# Altium PCB lab1_lyahovskij_USB_I2C.PcbDoc
Units mm, origin at the board's own origin, x right, y up, seen from the top; angles counter-clockwise.
Board outline 49.2 x 21.45 mm, 4 copper layers (Top Layer, Signal Layer 1, Signal Layer 2, Bottom Layer), stack 1.522 mm thick; 22 components, 18 nets, 88 pads, 79 vias.
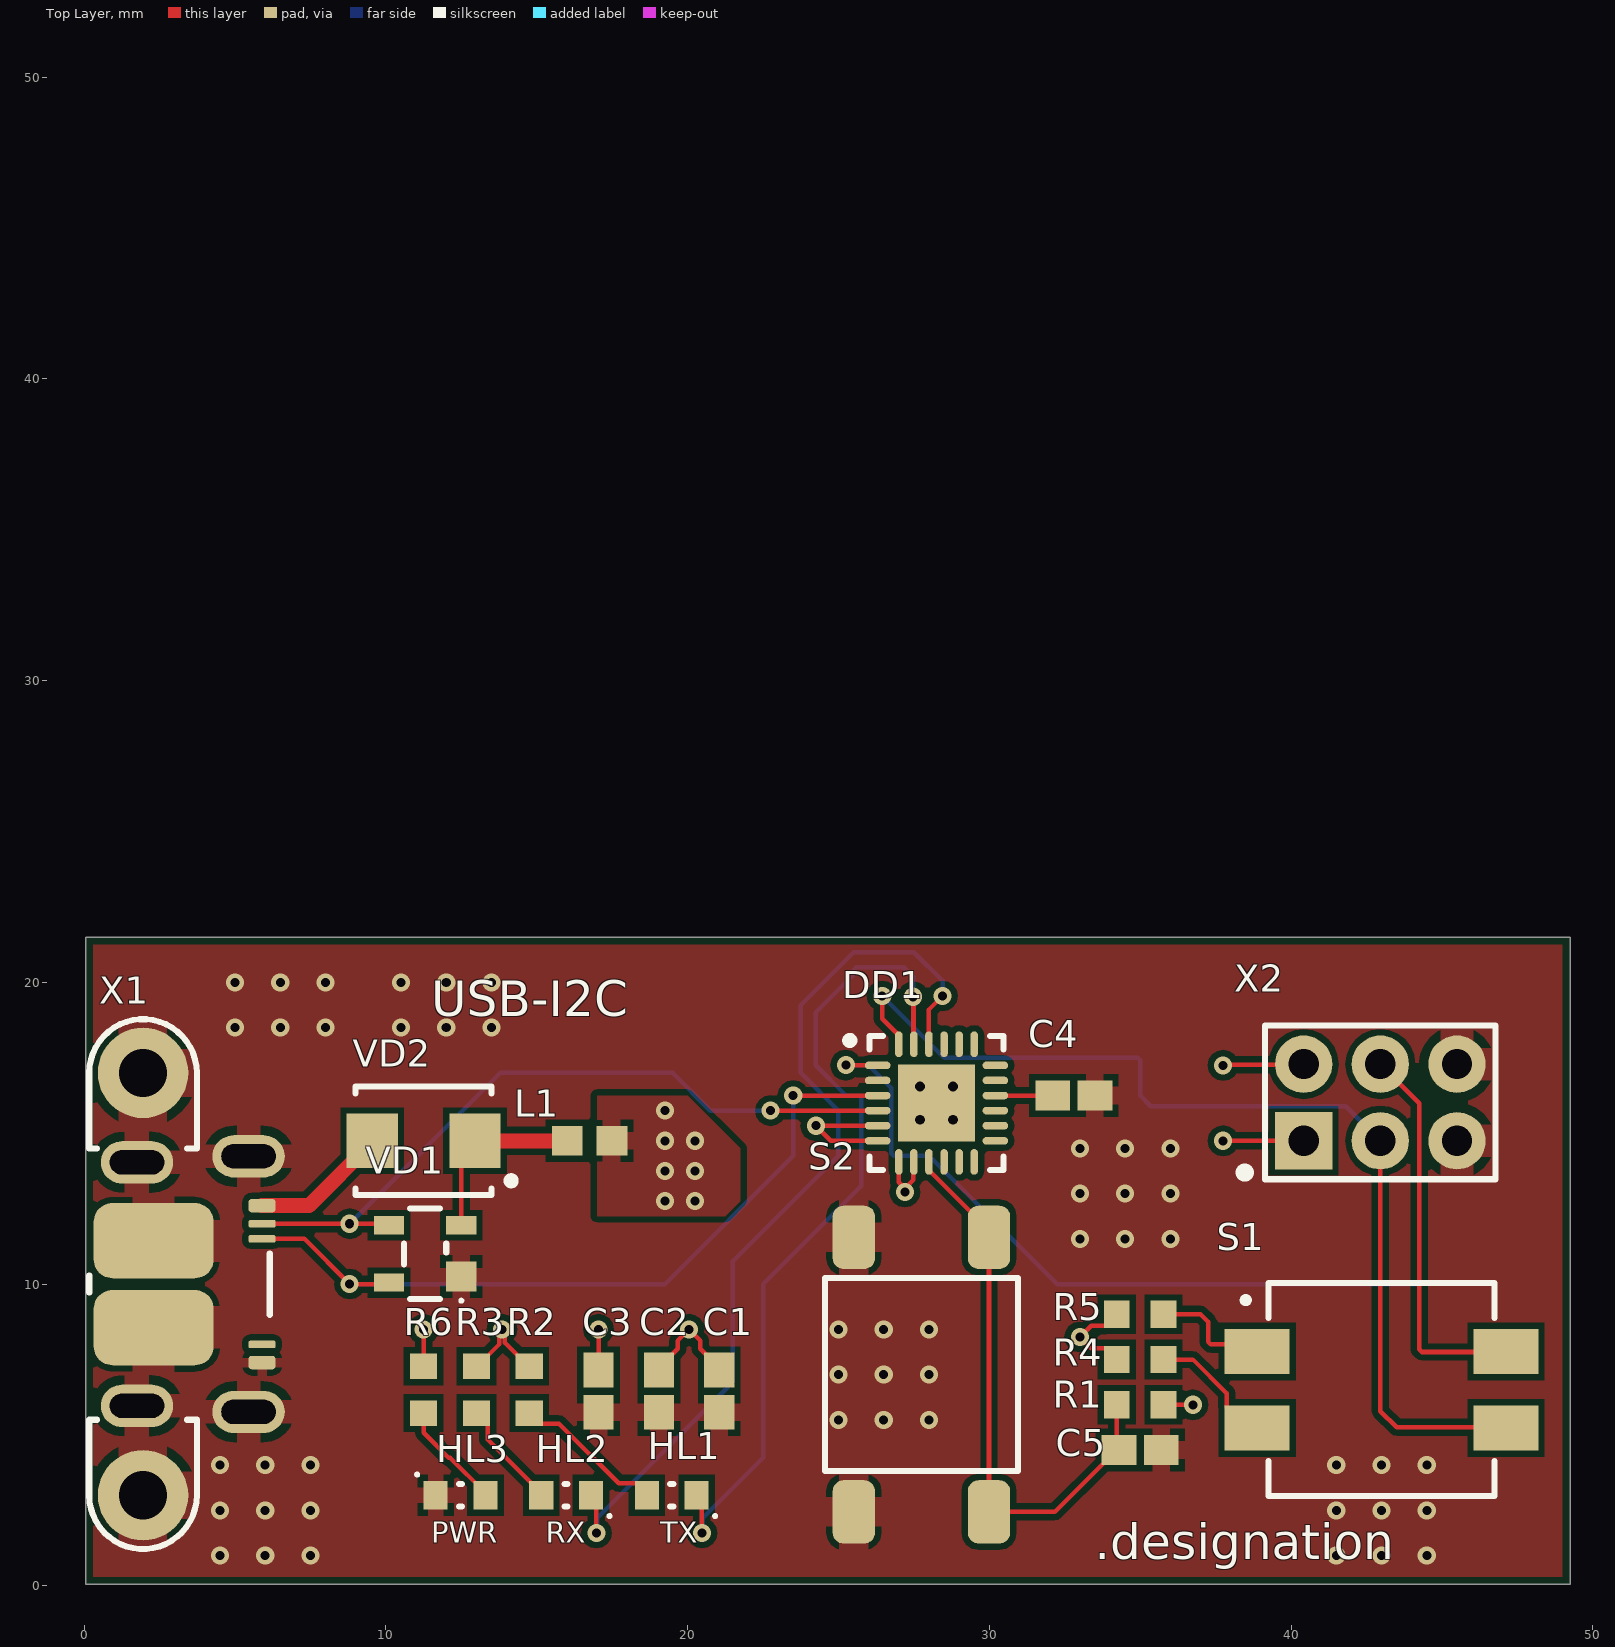
[diagram p0: Top Layer view]
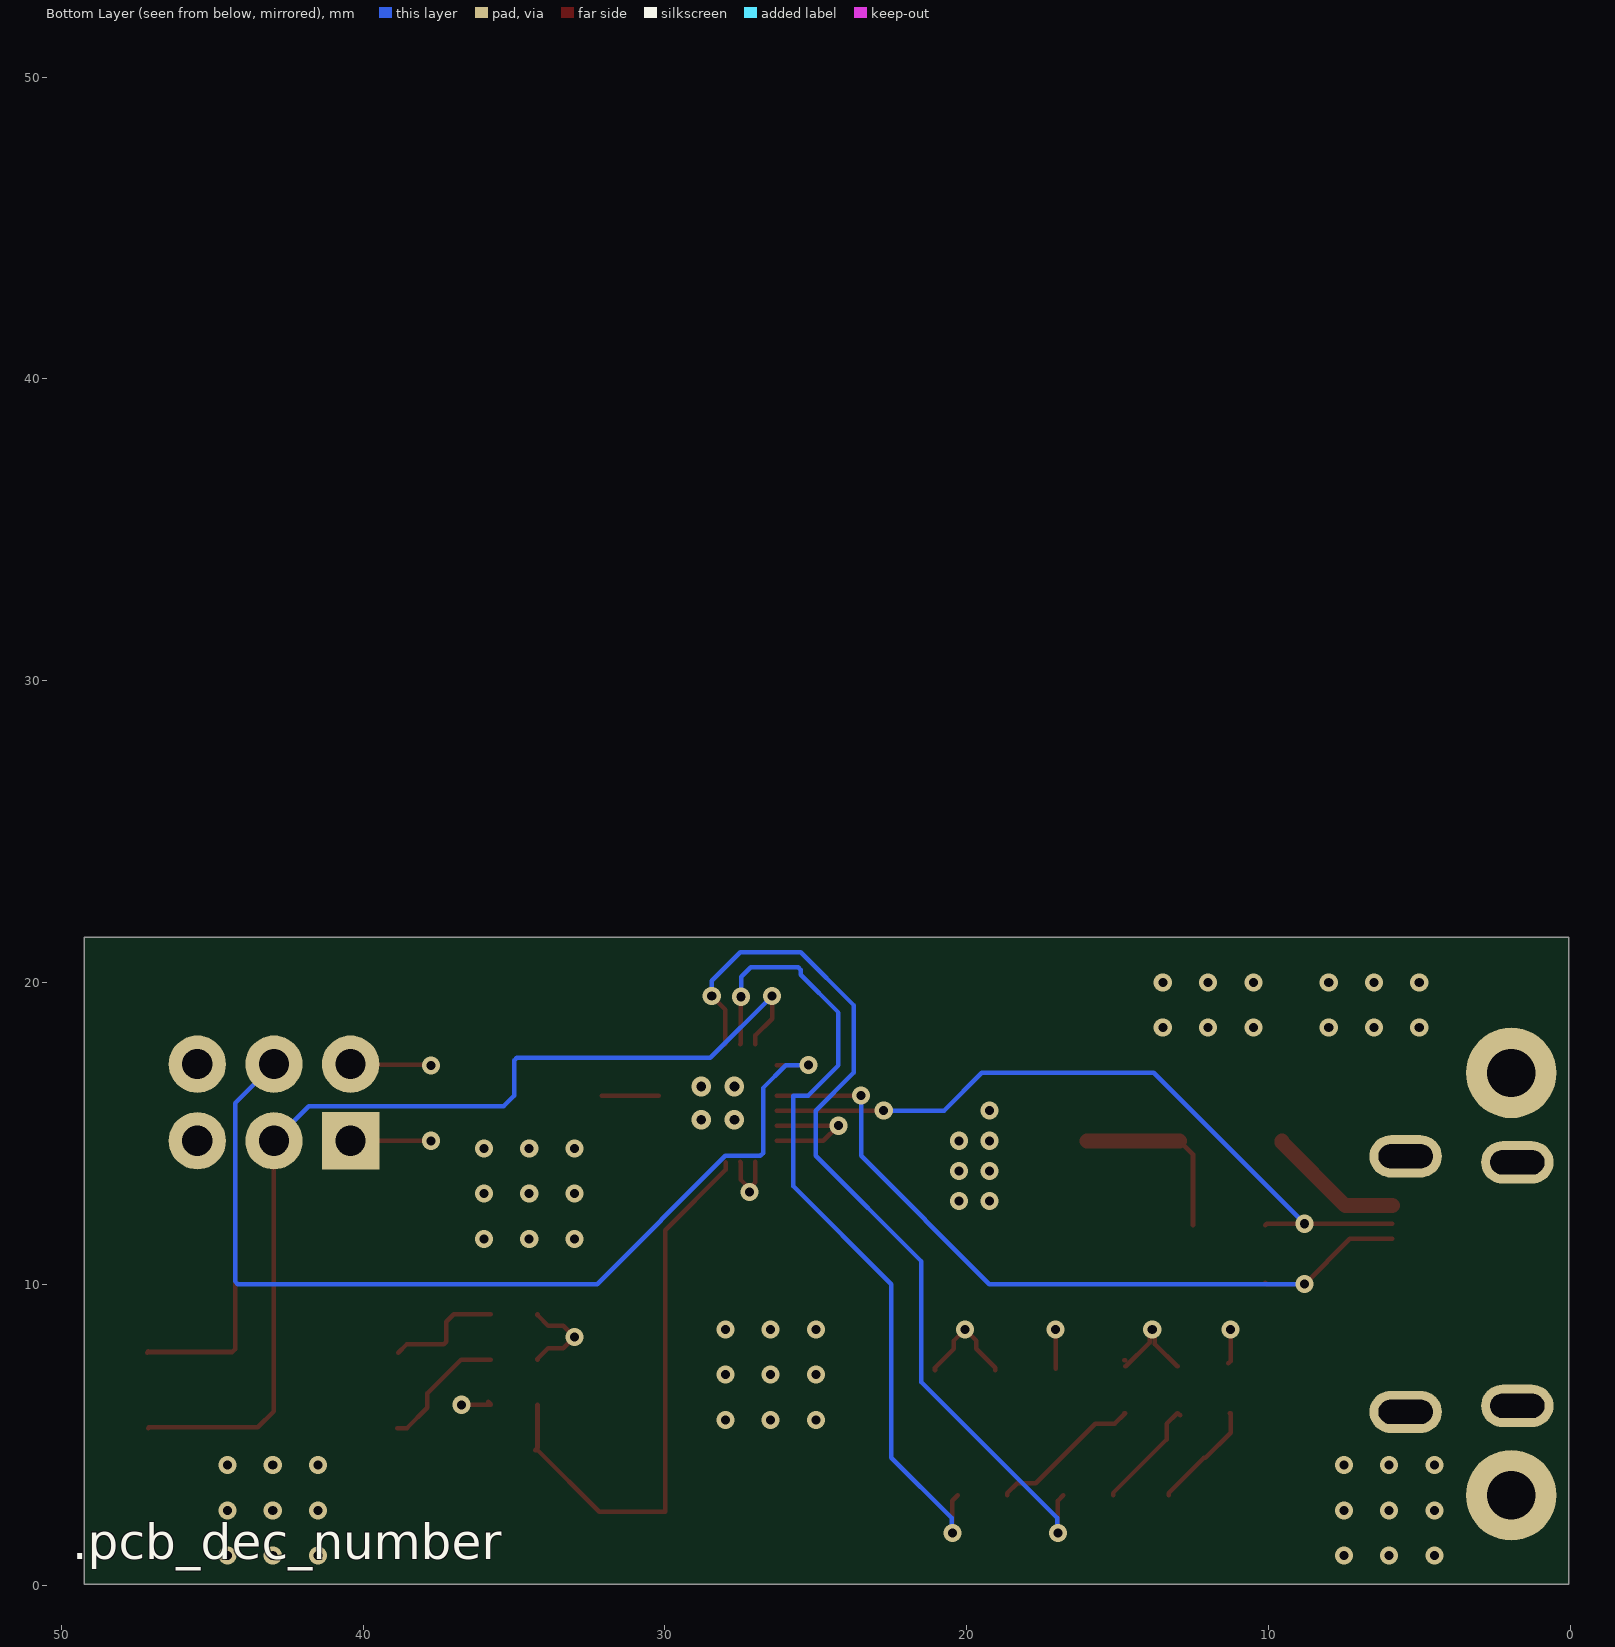
[diagram p1: Bottom Layer view, seen from below]
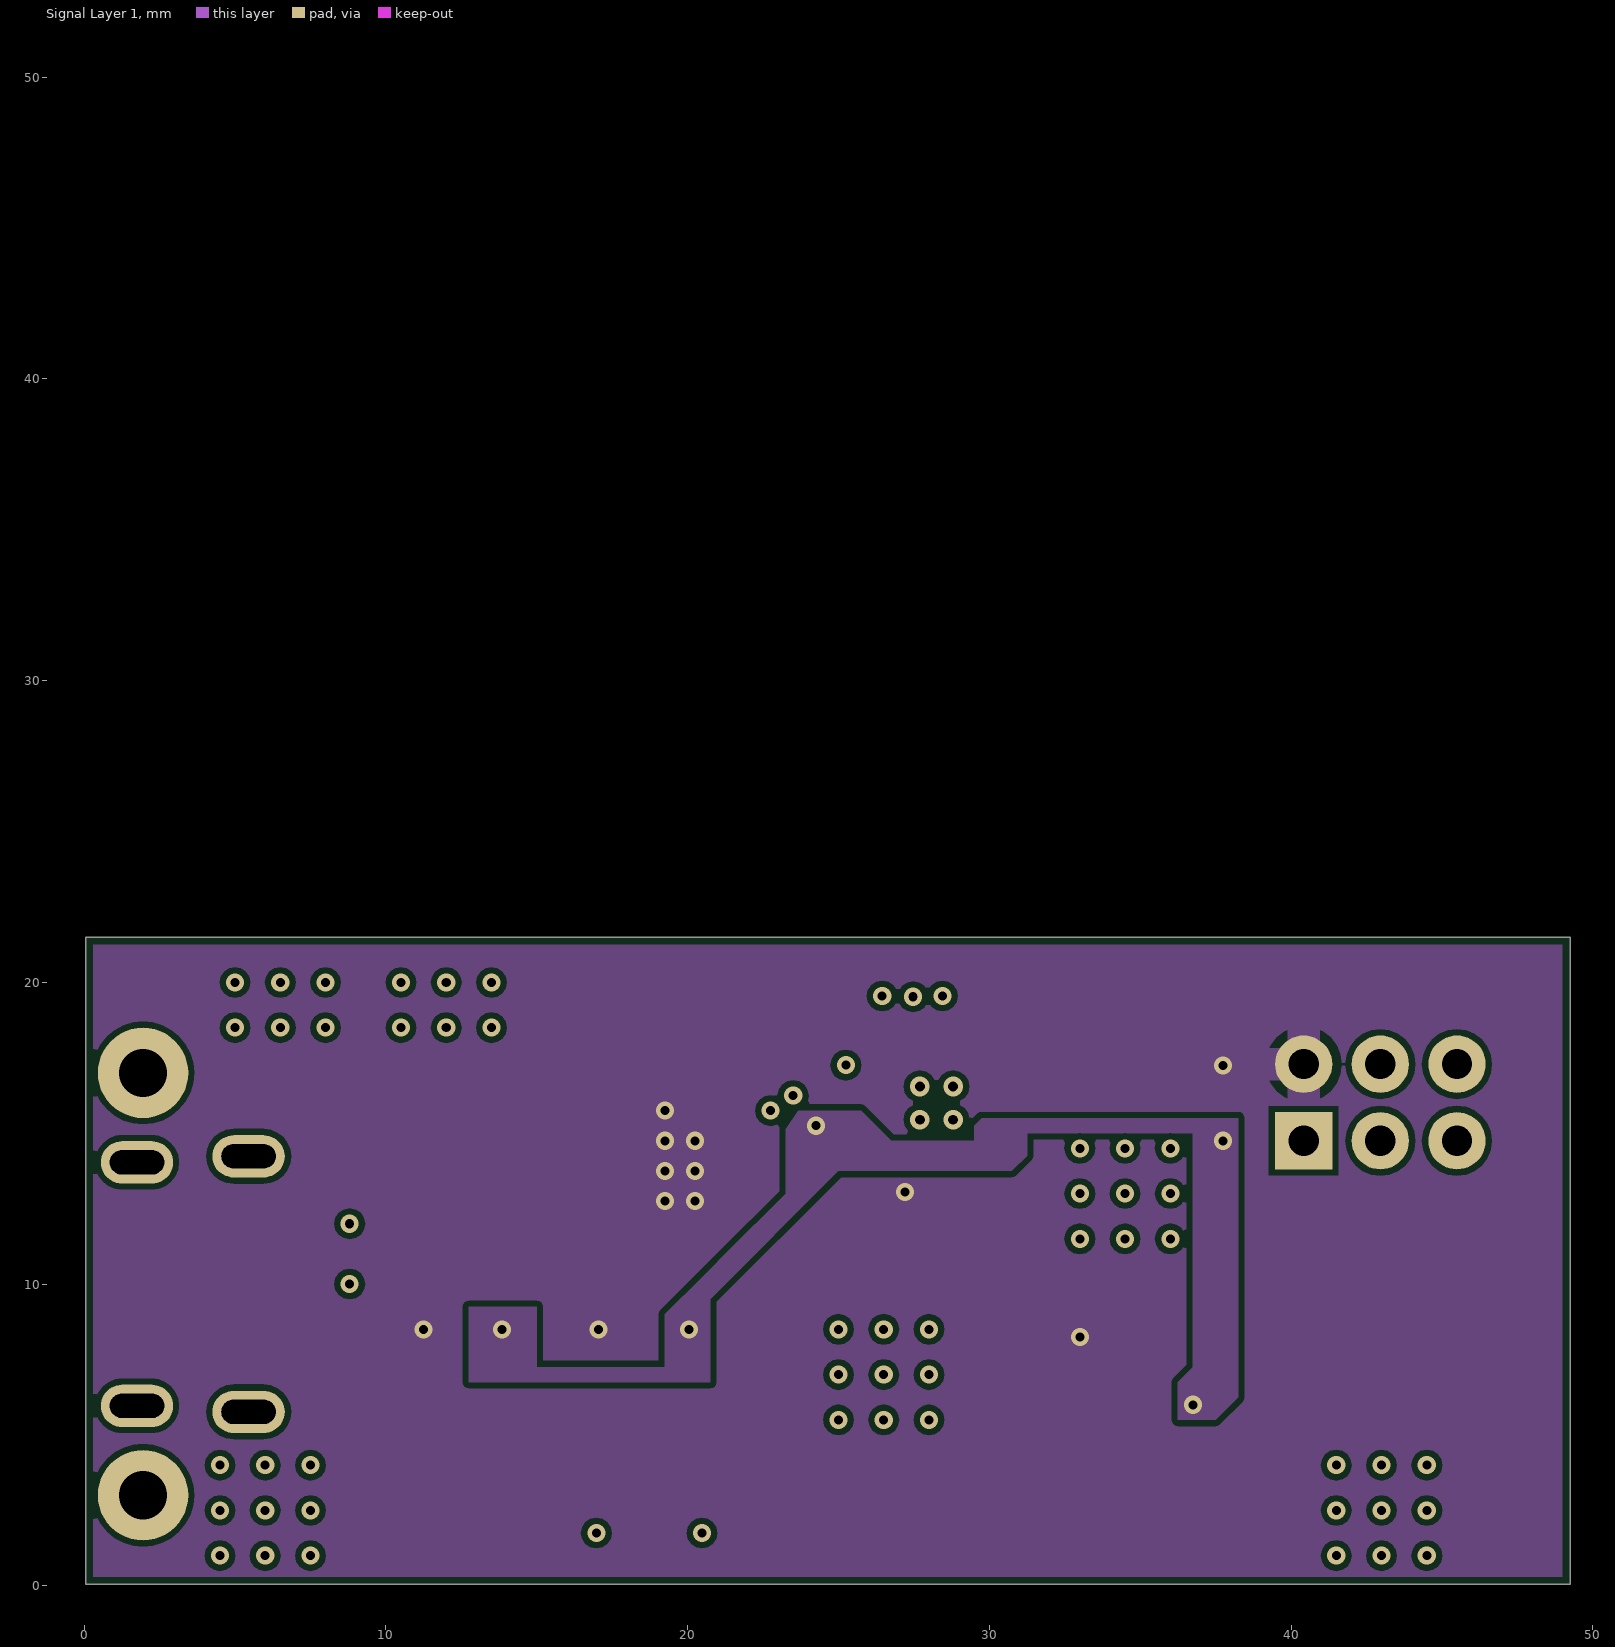
[diagram p2: Signal Layer 1]
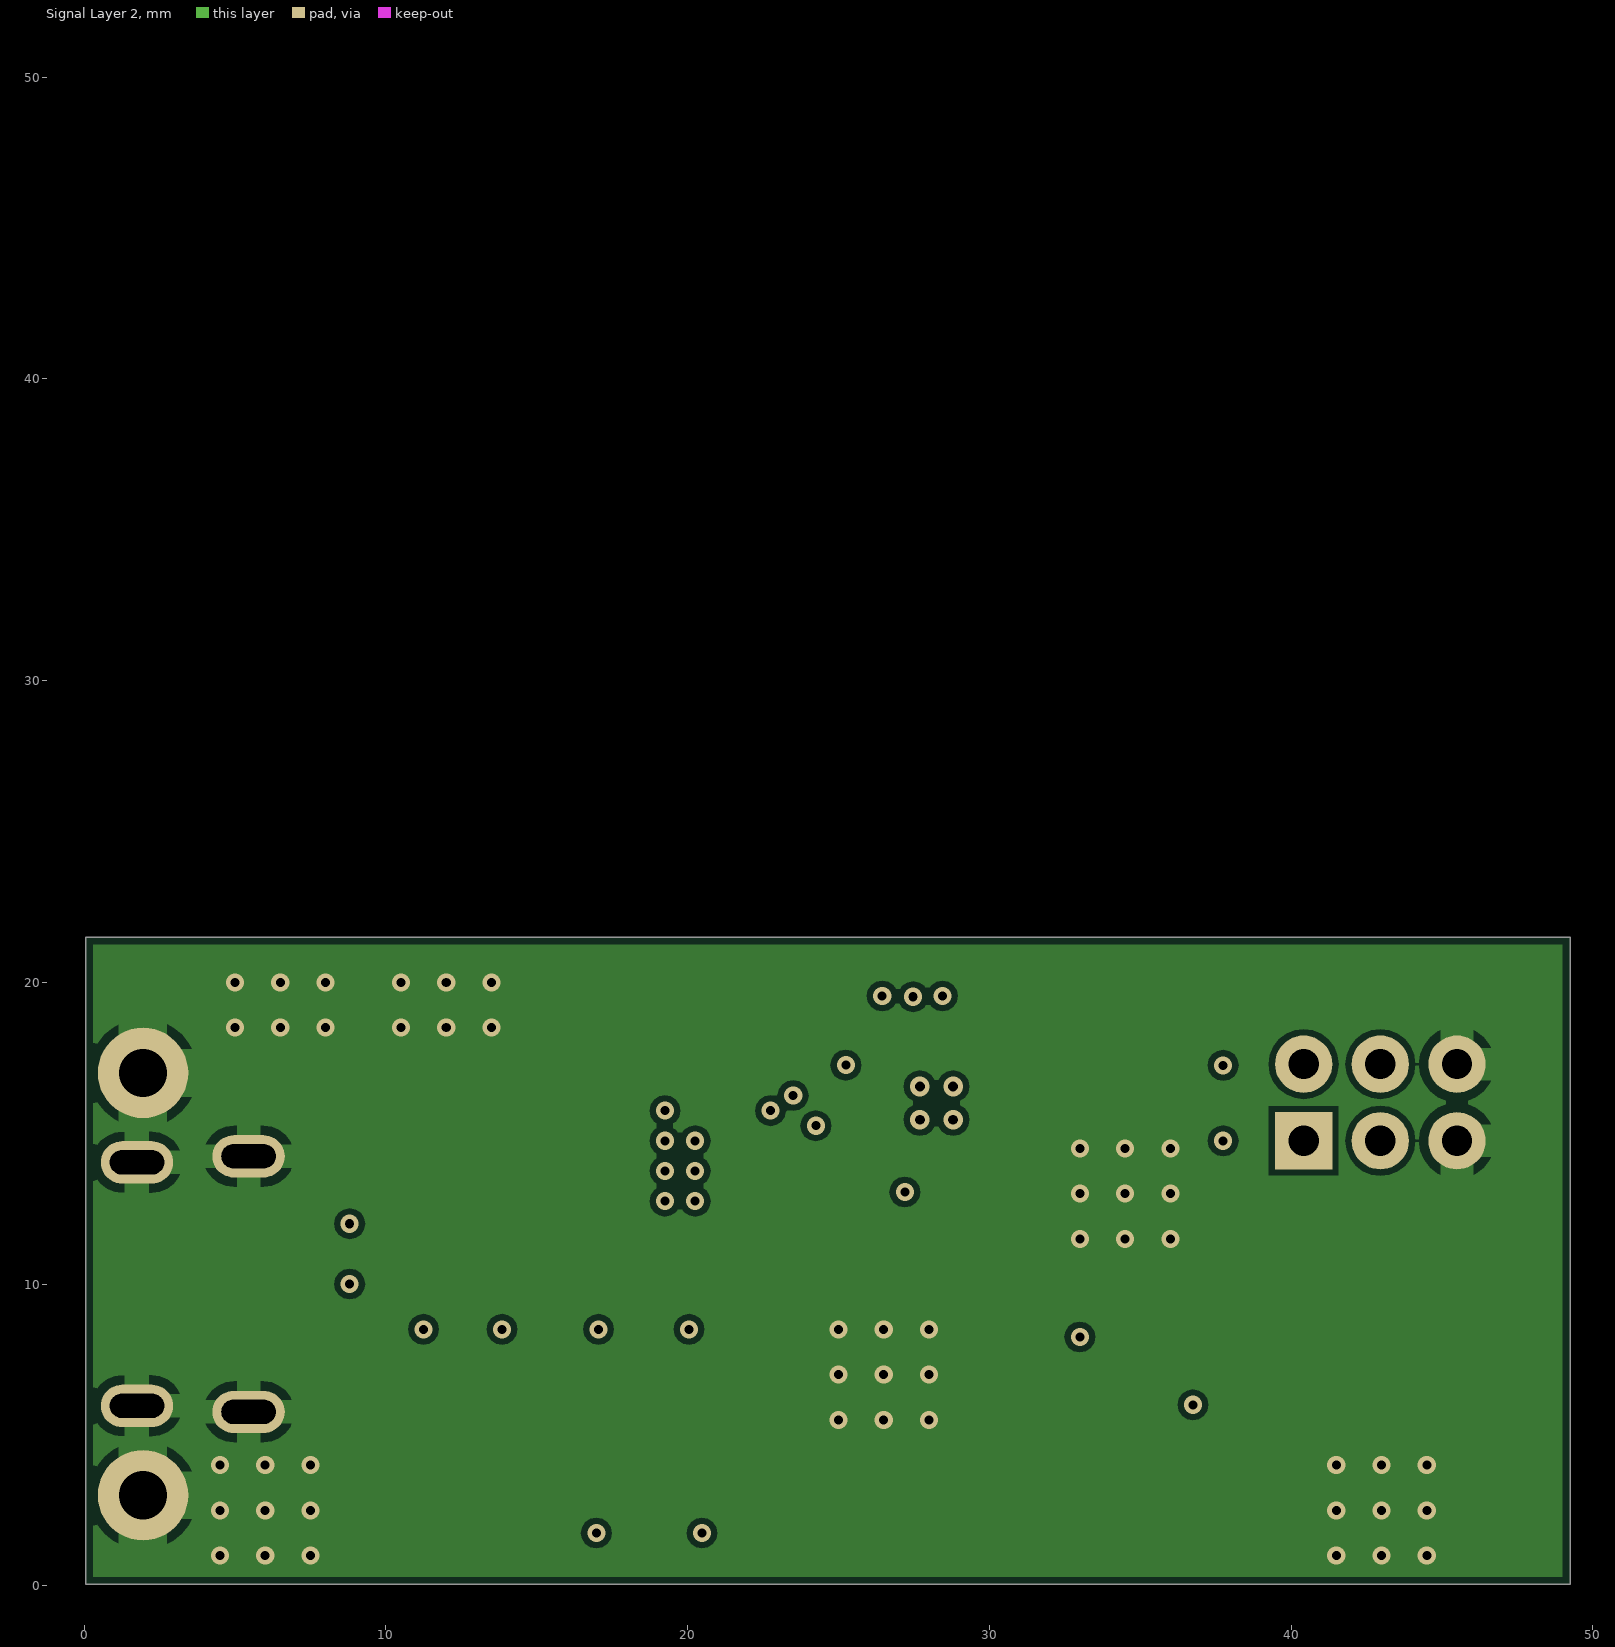
[diagram p3: Signal Layer 2]

## Layer stack, top to bottom
Top Solder: solder mask 0.0102, Solder Resist, Dk 3.5
Top Layer: signal copper 0.018
Prepreg 1: prepreg 0.125, FR4 HiTg170, Dk 5.07
Signal Layer 1: signal copper 0.018
Core 1: core 1.2, FR4, Dk 4.6
Signal Layer 2: signal copper 0.018
Prepreg 2: prepreg 0.125, FR4 HiTg170, Dk 5.07
Bottom Layer: signal copper 0.018
Bottom Solder: solder mask 0.0102, Solder Resist, Dk 3.5

## Board outline
0.05,0.05 0.05,21.5 49.25,21.5 49.25,0.05

## Design rules (kind name [scope] priority, off if disabled: settings)
AcuteAngle min_acute_angle [OnCopper] p1: minimum=3.50000000000000E+0001 checktracksonly=FALSE // Минимальный угол между примитивами топологии
BoardOutlineClearance board_outline_clearance_std [NOT (OnLayer('Bottom Overlay') OR OnLayer('Top Overlay'))] p1: gap=0.25 ignorepadtopadclearanceinfootprint=FALSE except(0: Arc-SplitContinuation Track-SplitContinuation SMDPad-SplitContinuation THPad-SplitContinuation Via-SplitContinuation Fill-SplitContinuation Poly-SplitContinuation Region-SplitContinuation Text-SplitContinuation) // Отступ элементов топологии от края фрезеруемой печатной платы
Clearance clearance_outer_18um_std [OnTopLayer OR OnBottomLayer] p1: gap=0.125 ignorepadtopadclearanceinfootprint=TRUE except(0.2: Arc-Fill Arc-Poly Track-Fill Track-Poly SMDPad-SMDPad SMDPad-Fill SMDPad-Poly THPad-Fill THPad-Poly Via-Fill Via-Poly Fill-Fill Fill-Poly Poly-Poly Poly-Region Poly-Text; 0.25: Arc-Hole Track-Hole SMDPad-Hole THPad-Hole Via-Hole Fill-Hole Poly-Hole Region-Hole Text-Hole) // Зазоры на внешних слоях
Clearance clearance_inner_18um_std [NOT (OnTopLayer Or OnBottomLayer)] p2: gap=0.125 ignorepadtopadclearanceinfootprint=FALSE except(0.2: Arc-Fill Arc-Poly Track-Fill Track-Poly SMDPad-SMDPad SMDPad-Fill SMDPad-Poly THPad-Fill THPad-Poly Via-Fill Via-Poly Fill-Fill Fill-Poly Poly-Poly Poly-Region Poly-Text; 0.25: Arc-Hole Track-Hole SMDPad-Hole THPad-Hole Via-Hole Fill-Hole Poly-Hole Region-Hole Text-Hole) // Зазоры на внутренних слоях
ComponentClearance [All] p1: gap=0 collisioncheckmode=3 verticalgap=0 showdistances=FALSE
DiffPairsRouting diff_pairs_routing [All] p1: maxlimit=0.254 minlimit=0.127 mostfreqgap=0.254 toplayer_maxgap=0.127 toplayer_prefgap=0.127 toplayer_minwidth=0.143 toplayer_maxwidth=0.143 toplayer_prefwidth=0.143 midlayer1_minwidth=0.381 midlayer1_maxwidth=0.381 midlayer1_prefwidth=0.381 midlayer2_minwidth=0.381 midlayer2_maxwidth=0.381 midlayer2_prefwidth=0.381 bottomlayer_maxgap=0.127 bottomlayer_prefgap=0.127 bottomlayer_minwidth=0.143 bottomlayer_maxwidth=0.143 bottomlayer_prefwidth=0.143 impedanceprofiledriven=TRUE maxuncoupledlength=12.7 // Правила трассировки дифференциальных пар
HoleSize min_hole_size_std [IsPad] p1: absolutevalues=TRUE maxlimit=5.9 minlimit=0.6 maxpercent=80.000 minpercent=20.000 // Диаметр межслойного переходного отверстия
HoleSize min_hole_size_via_std [IsVia] p2: absolutevalues=TRUE maxlimit=5.9 minlimit=0.3 maxpercent=80.000 minpercent=20.000 // Минимальный диаметр монтажного отверстия
HoleToHoleClearance hole_to_hole_clearance_std [All] p1: gap=0.2 allowstackedmicrovias=FALSE // Минимальное расстояние между краями двух отверстий
MinimumAnnularRing min_via_ar_std [All] p1: minimumring=0.15 // Поясок площадки переходного отверстия (Annular ring VIA)
MinimumAnnularRing min_pad_ar_std [All] p2: minimumring=0.2 // Поясок монтажной контактной площадки (Annular ring PAD)
MinimumSolderMaskSliver min_solder_mask_bridge_std [All] p1: minsoldermaskwidth=0.15 // Мнимальная ширина масочного мостика
PlaneClearance plane_clearance_18um_std [All] p1: clearance=0.2 // Отступ полигона (для слоя plane) от элементов топологии
PlaneConnect [All] p1: planeconnectstyle=Relief reliefexpansion=0.5 reliefentries=4 reliefconductorwidth=0.2 reliefairgap=0.2
PolygonConnect poly_connect_to_pad<=0.3 [(AsMM(PadXSize_AllLayers)<=0.301) or (AsMM(PadYSize_AllLayers)<=0.301)] p1: thpad.connectstyle=Relief thpad.reliefconductorwidth=0.2 thpad.reliefentries=4 thpad.polygonreliefangle="90 Angle" thpad.airgapwidth=0.2 smdpad.connectstyle=Relief smdpad.reliefconductorwidth=0.2 smdpad.reliefentries=4 smdpad.polygonreliefangle="90 Angle" smdpad.airgapwidth=0.2 via.connectstyle=Direct via.reliefconductorwidth=0.254 via.reliefentries=4 via.polygonreliefangle="90 Angle" via.airgapwidth=0.254 // Правила подключения полигонов для падов от 0,3мм и меньше
PolygonConnect poly_connect_to_pad<=0.4 [(AsMM(PadXSize_AllLayers)<=0.401) or (AsMM(PadYSize_AllLayers)<=0.401)] p2: thpad.connectstyle=Relief thpad.reliefconductorwidth=0.26 thpad.reliefentries=4 thpad.polygonreliefangle="90 Angle" thpad.airgapwidth=0.2 smdpad.connectstyle=Relief smdpad.reliefconductorwidth=0.26 smdpad.reliefentries=4 smdpad.polygonreliefangle="90 Angle" smdpad.airgapwidth=0.2 via.connectstyle=Direct via.reliefconductorwidth=0.254 via.reliefentries=4 via.polygonreliefangle="90 Angle" via.airgapwidth=0.254 // Правила подключения полигонов для падов от 0,4 и меньше
PolygonConnect poly_connect_to_pad<=0.6 [(AsMM(PadXSize_AllLayers)<=0.601) or (AsMM(PadYSize_AllLayers)<=0.601)] p3: thpad.connectstyle=Relief thpad.reliefconductorwidth=0.33 thpad.reliefentries=4 thpad.polygonreliefangle="90 Angle" thpad.airgapwidth=0.2 smdpad.connectstyle=Relief smdpad.reliefconductorwidth=0.33 smdpad.reliefentries=4 smdpad.polygonreliefangle="90 Angle" smdpad.airgapwidth=0.2 via.connectstyle=Direct via.reliefconductorwidth=0.254 via.reliefentries=4 via.polygonreliefangle="90 Angle" via.airgapwidth=0.254 // Правила подключения полигонов для падов от 0,6мм и меньше
PolygonConnect poly_connect_to_pad<=0.7 [(AsMM(PadXSize_AllLayers)<=0.701) or (AsMM(PadYSize_AllLayers)<=0.701)] p4: thpad.connectstyle=Relief thpad.reliefconductorwidth=0.46 thpad.reliefentries=4 thpad.polygonreliefangle="90 Angle" thpad.airgapwidth=0.2 smdpad.connectstyle=Relief smdpad.reliefconductorwidth=0.46 smdpad.reliefentries=4 smdpad.polygonreliefangle="90 Angle" smdpad.airgapwidth=0.2 via.connectstyle=Direct via.reliefconductorwidth=0.254 via.reliefentries=4 via.polygonreliefangle="90 Angle" via.airgapwidth=0.254 // Правила подключения полигонов для падов от 0,7мм и меньше
PolygonConnect poly_connect_to_pad<=0.8 [(AsMM(PadXSize_AllLayers)<=0.8)or(AsMM(PadYSize_AllLayers)<=0.8)] p5: thpad.connectstyle=Relief thpad.reliefconductorwidth=0.53 thpad.reliefentries=4 thpad.polygonreliefangle="90 Angle" thpad.airgapwidth=0.3 smdpad.connectstyle=Relief smdpad.reliefconductorwidth=0.53 smdpad.reliefentries=4 smdpad.polygonreliefangle="90 Angle" smdpad.airgapwidth=0.2 via.connectstyle=Direct via.reliefconductorwidth=0.254 via.reliefentries=4 via.polygonreliefangle="90 Angle" via.airgapwidth=0.254 // Правила подключения полигонов для падов от 0,8мм и меньше
PolygonConnect poly_connect_to_pad<=1 [(AsMM(PadXSize_AllLayers)<=1.01)or(AsMM(PadYSize_AllLayers)<=1.01)] p6: thpad.connectstyle=Relief thpad.reliefconductorwidth=0.6 thpad.reliefentries=4 thpad.polygonreliefangle="90 Angle" thpad.airgapwidth=0.3 smdpad.connectstyle=Relief smdpad.reliefconductorwidth=0.6 smdpad.reliefentries=4 smdpad.polygonreliefangle="90 Angle" smdpad.airgapwidth=0.2 via.connectstyle=Direct via.reliefconductorwidth=0.254 via.reliefentries=4 via.polygonreliefangle="90 Angle" via.airgapwidth=0.254 // Правила подключения полигонов для падов от 1мм и меньше
PolygonConnect poly_connect_to_pad<=1.3 [(AsMM(PadXSize_AllLayers)<=1.31)or(AsMM(PadYSize_AllLayers)<=1.31)] p7: thpad.connectstyle=Relief thpad.reliefconductorwidth=0.66 thpad.reliefentries=4 thpad.polygonreliefangle="90 Angle" thpad.airgapwidth=0.3 smdpad.connectstyle=Relief smdpad.reliefconductorwidth=0.86 smdpad.reliefentries=4 smdpad.polygonreliefangle="90 Angle" smdpad.airgapwidth=0.2 via.connectstyle=Direct via.reliefconductorwidth=0.254 via.reliefentries=4 via.polygonreliefangle="90 Angle" via.airgapwidth=0.254 // Правила подключения полигонов для падов от 1,3мм и меньше
PolygonConnect poly_connect_to_pad<=1.6 [(AsMM(PadXSize_AllLayers)<=1.61)or(AsMM(PadYSize_AllLayers)<=1.61)] p8: thpad.connectstyle=Relief thpad.reliefconductorwidth=0.8 thpad.reliefentries=4 thpad.polygonreliefangle="90 Angle" thpad.airgapwidth=0.3 smdpad.connectstyle=Relief smdpad.reliefconductorwidth=1 smdpad.reliefentries=4 smdpad.polygonreliefangle="90 Angle" smdpad.airgapwidth=0.2 via.connectstyle=Direct via.reliefconductorwidth=0.254 via.reliefentries=4 via.polygonreliefangle="90 Angle" via.airgapwidth=0.254 // Правила подключения полигонов для падов от 1,6мм и меньше
PolygonConnect poly_connect_to_pad<=1.8 [(AsMM(PadXSize_AllLayers)<=1.8)or(AsMM(PadYSize_AllLayers)<=1.8)] p9: thpad.connectstyle=Relief thpad.reliefconductorwidth=1 thpad.reliefentries=4 thpad.polygonreliefangle="90 Angle" thpad.airgapwidth=0.3 smdpad.connectstyle=Relief smdpad.reliefconductorwidth=1.2 smdpad.reliefentries=4 smdpad.polygonreliefangle="90 Angle" smdpad.airgapwidth=0.2 via.connectstyle=Direct via.reliefconductorwidth=0.254 via.reliefentries=4 via.polygonreliefangle="90 Angle" via.airgapwidth=0.254 // Правила подключения полигонов для падов от 1,8мм и меньше
PolygonConnect poly_connect_to_pad<=2 [(AsMM(PadXSize_AllLayers)<=2.01)or(AsMM(PadYSize_AllLayers)<=2.01)] p10: thpad.connectstyle=Relief thpad.reliefconductorwidth=1.1 thpad.reliefentries=4 thpad.polygonreliefangle="90 Angle" thpad.airgapwidth=0.3 smdpad.connectstyle=Relief smdpad.reliefconductorwidth=1.4 smdpad.reliefentries=4 smdpad.polygonreliefangle="90 Angle" smdpad.airgapwidth=0.2 via.connectstyle=Direct via.reliefconductorwidth=0.254 via.reliefentries=4 via.polygonreliefangle="90 Angle" via.airgapwidth=0.254 // Правила подключения полигонов для падов от 2мм и меньше
PolygonConnect poly_connect_to_pad<=2.3 [(AsMM(PadXSize_AllLayers)<=2.31)or(AsMM(PadYSize_AllLayers)<=2.31)] p11: thpad.connectstyle=Relief thpad.reliefconductorwidth=1.2 thpad.reliefentries=4 thpad.polygonreliefangle="90 Angle" thpad.airgapwidth=0.3 smdpad.connectstyle=Relief smdpad.reliefconductorwidth=1.4 smdpad.reliefentries=4 smdpad.polygonreliefangle="90 Angle" smdpad.airgapwidth=0.2 via.connectstyle=Direct via.reliefconductorwidth=0.254 via.reliefentries=4 via.polygonreliefangle="90 Angle" via.airgapwidth=0.254 // Правила подключения полигонов для падов от 2,3мм и меньше
PolygonConnect poly_connect_to_pad<=2.5 [(AsMM(PadXSize_AllLayers)<=2.51)or(AsMM(PadYSize_AllLayers)<=2.51)] p12: thpad.connectstyle=Relief thpad.reliefconductorwidth=1.2 thpad.reliefentries=4 thpad.polygonreliefangle="90 Angle" thpad.airgapwidth=0.3 smdpad.connectstyle=Relief smdpad.reliefconductorwidth=1.4 smdpad.reliefentries=4 smdpad.polygonreliefangle="90 Angle" smdpad.airgapwidth=0.2 via.connectstyle=Direct via.reliefconductorwidth=0.254 via.reliefentries=4 via.polygonreliefangle="90 Angle" via.airgapwidth=0.254 // Правила подключения полигонов для падов от 2,5мм и меньше
PolygonConnect poly_connect_to_pad<=2.7 [(AsMM(PadXSize_AllLayers)<=2.71)or(AsMM(PadYSize_AllLayers)<=2.71)] p13: thpad.connectstyle=Relief thpad.reliefconductorwidth=1.4 thpad.reliefentries=4 thpad.polygonreliefangle="90 Angle" thpad.airgapwidth=0.3 smdpad.connectstyle=Relief smdpad.reliefconductorwidth=1.6 smdpad.reliefentries=4 smdpad.polygonreliefangle="90 Angle" smdpad.airgapwidth=0.2 via.connectstyle=Direct via.reliefconductorwidth=0.254 via.reliefentries=4 via.polygonreliefangle="90 Angle" via.airgapwidth=0.254 // Правила подключения полигонов для падов от 2,7мм и меньше
PolygonConnect poly_connect_to_pad<=3 [(AsMM(PadXSize_AllLayers)<=3.01)or(AsMM(PadYSize_AllLayers)<=3.01)] p14: thpad.connectstyle=Relief thpad.reliefconductorwidth=1.6 thpad.reliefentries=4 thpad.polygonreliefangle="90 Angle" thpad.airgapwidth=0.3 smdpad.connectstyle=Relief smdpad.reliefconductorwidth=1.8 smdpad.reliefentries=4 smdpad.polygonreliefangle="90 Angle" smdpad.airgapwidth=0.2 via.connectstyle=Direct via.reliefconductorwidth=0.254 via.reliefentries=4 via.polygonreliefangle="90 Angle" via.airgapwidth=0.254 // Правила подключения полигонов для падов от 3мм и меньше
PolygonConnect poly_connect_to_pad<=7 [(AsMM(PadXSize_AllLayers)<7.01)or(AsMM(PadYSize_AllLayers)<=7.01)] p15: thpad.connectstyle=Relief thpad.reliefconductorwidth=2 thpad.reliefentries=4 thpad.polygonreliefangle="90 Angle" thpad.airgapwidth=0.4 smdpad.connectstyle=Relief smdpad.reliefconductorwidth=2 smdpad.reliefentries=4 smdpad.polygonreliefangle="90 Angle" smdpad.airgapwidth=0.3 via.connectstyle=Direct via.reliefconductorwidth=0.254 via.reliefentries=4 via.polygonreliefangle="90 Angle" via.airgapwidth=0.254 // Правила подключения полигонов для падов от 7мм и меньше
PolygonConnect poly_connect_to_pad [All] p16: thpad.connectstyle=Relief thpad.reliefconductorwidth=0.25 thpad.reliefentries=4 thpad.polygonreliefangle="90 Angle" thpad.airgapwidth=0.2 smdpad.connectstyle=Relief smdpad.reliefconductorwidth=0.25 smdpad.reliefentries=4 smdpad.polygonreliefangle="90 Angle" smdpad.airgapwidth=0.2 via.connectstyle=Direct via.reliefconductorwidth=0.25 via.reliefentries=4 via.polygonreliefangle="90 Angle" via.airgapwidth=0.2 // Правила подключения полигонов общие
RoutingCorners [All] p1 off: cornerstyle=45-Degree minsetback=2.5 maxsetback=2.5
RoutingVias [All] p1: holewidth=0.3 width=0.6 viastyle="Through Hole" minholewidth=0.3 minwidth=0.6 maxholewidth=5.9 maxwidth=6.4
SilkToSilkClearance silk_to_silk_clearance_std [All] p1 off: silktosilkclearance=0.15 // Отступ текста шелкографии от других примитивов шелкографии
SilkToSolderMaskClearance silk_to_solder_mask_clearance_std [IsPad] p1 off: minsilkscreentomaskgap=0.15 clearancetoexposedcopper=FALSE // Минимальное расстояние между элементами шелкографии и вскрытой медью
SolderMaskExpansion solder_mask_expansion_std [All] p1: expansion=0.05 // Припуск паяльной масски
UnRoutedNet [All] p1: checkbadconnections=TRUE
Width width_18um_std [All] p1: maxlimit=10 minlimit=0.125 preferedwidth=0.15 checkconnectedcopper=TRUE // Ширина проводников (общая)
19 further rules are at their usual default settings.

## Components (designator, comment, footprint, x,y, rotation, side; value= is the part's Value field where it differs from the comment)
C1 "2,2 мк" C0603 21.05,6.45 r270 top
C2 "0,1 мк" C0603 19.05,6.45 r270 top
C3 "1 мк" C0603 17.05,6.45 r270 top
C4 "4,7 мк" C0603 32.8,16.25 r180 top
C5 "0,1 мк" C0603 35,4.5 r0 top
DD1 "CP2112-F03-GMR" CP2112 28.25,16 r0 top
HL1 "TLMG1100-GS08" HL0603 19.475,3 r180 top
HL2 "TLMY1000-GS08" HL0603 15.975,3 r180 top
HL3 "TLMS1000-GS08" HL0603 12.475,3 r0 top
L1 "BLM18KG221SH1D" BLM-2-0603 16.75,14.75 r0 top
R1 "4,7 к" R0603 35,6 r180 top
R2 "220" R0603 14.75,6.5 r90 top
R3 "220" R0603 13,6.5 r90 top
R4 "10 к" R0603 35,7.5 r180 top
R5 "10 к" R0603 35,9 r180 top
R6 "10 к" R0603 11.25,6.5 r90 top
S1 "SDA02H1SBD" DIP-SWITCH-02-706X930X545 43,6.5 r0 top
S2 "FSM4JSMA" FSM4JSMA 27.75,7 r270 top
VD1 "SP0503BAHTG" SOT143-4 11.3,11 r180 top
VD2 "SL13-E3/5AT" DO-214AC 11.25,14.75 r180 top
X1 "2108877-1" 2108877-1 2.2,10 r90 top locked
X2 "DS1021-2*3SF11" DS1021-2X3SF11 42.96,16.02 r0 top

## Footprints (in the part's own frame and the unit in brackets; to place one, negate y for a bottom-side part, rotate by r counter-clockwise, add the part's x,y. Pads: shape width x height; smd on the part's side, far side on the other; paste and mask are expansions set on the pad)
2108877-1 [mm]
  rrect50% 0.45x0.9 smd: 1(2.6,-3.696) 5(-2.6,-3.696)
  rrect50% 0.25x0.9 smd: 2(2,-3.696) 3(1.5,-3.696) 4(-2,-3.696)
  round 3 hole 1.6: TP1(-7,0.25) TP1(7,0.25)
  oval 1.4x2.4 hole 0.8 slot 1.8 at 90 deg mask+0.102: TP1(-4.235,-3.25) TP1(-4.035,0.45) TP1(4.035,0.45) TP1(4.235,-3.25)
  rrect50% 2.5x3.98 smd: TP1(-1.441,-0.104) TP1(1.441,-0.104)
  silkscreen extent -8.78,-3.95 8.78,2.03, body extent -8.9,-3.95 8.9,3.95, height 3.39
BLM-2-0603 [mm] "Chip Inductor, 2-Leads, Body 1,60x0,80mm, IPC Medium Density"
  rect 1.02x0.98 smd: 1(-0.74,0) 2(0.74,0)
  body extent -0.8,-0.37 0.8,0.38, height 0.8
C0603 [mm] "Chip Capacitor, 2-Leads, Body 1,60x0,80mm, IPC Medium Density"
  rect 1.15x1 smd: 1(-0.7,0) 2(0.7,0)
  body extent -0.8,-0.4 0.8,0.4, height 0.8
CP2112 [mm] "QFN, 24-Leads, Body 4.00x4.00mm, Pitch 0.50mm, Thermal Pad 2.65x2.68mm, IPC Medium Density"
  oval 0.85x0.25 smd: 1(-1.95,1.25) 2(-1.95,0.75) 3(-1.95,0.25) 4(-1.95,-0.25) 5(-1.95,-0.75) 6(-1.95,-1.25) 13(1.95,-1.25) 14(1.95,-0.75) 15(1.95,-0.25) 16(1.95,0.25) 17(1.95,0.75) 18(1.95,1.25)
  oval 0.25x0.85 smd: 7(-1.25,-1.95) 8(-0.75,-1.95) 9(-0.25,-1.95) 10(0.25,-1.95) 11(0.75,-1.95) 12(1.25,-1.95) 19(1.25,1.95) 20(0.75,1.95) 21(0.25,1.95) 22(-0.25,1.95) 23(-0.75,1.95) 24(-1.25,1.95)
  rect 2.55x2.55 smd: 25(0,0)
  silkscreen extent -3,-2.22 2.22,2.23, body extent -2.08,-2.07 2.07,2.08, height 0.75
DIP-SWITCH-02-706X930X545 [mm]
  rect 2.15x1.5 smd: 1(-4.125,-1.27) 2(4.125,-1.27) 3(-4.125,1.27) 4(4.125,1.27)
  silkscreen extent -4.6,-3.53 3.74,3.53, body extent -4.65,-3.53 4.65,3.53, height 5.44
DO-214AC [mm] "Molded Diode, 2-Leads, Body 4,25x2,67mm, IPC Medium Density"
  rect 1.7x1.8 smd: 1(-1.7,0) 2(1.7,0)
  silkscreen extent -3.03,-1.8 2.25,1.8, body extent -2.7,-1.81 2.7,1.81, height 2.43
DS1021-2X3SF11 [mm]
  rect 1.9x1.9 hole 1: 1(-2.54,-1.27)
  round 1.9 hole 1: 2(-2.54,1.27) 3(0,-1.27)
  round 1.9 hole 1 mask+0.102: 4(0,1.27) 5(2.54,-1.27) 6(2.54,1.27)
  silkscreen extent -4.5,-2.55 3.81,2.54, body extent -3.81,-2.54 3.81,2.54, height 8.59
FSM4JSMA [mm]
  rrect50% 2.1x1.4 smd: 1(-4.55,2.24) 1(4.55,2.24) 2(-4.55,-2.24) 2(4.55,-2.24)
  silkscreen extent -3.2,-3.2 3.2,3.2, body extent -5,-3 5,3, height 5.13
HL0603 [mm] "Chip Diode, 2-Leads, Body 1,60x0,80mm, IPC Medium Density"
  rect 0.8x0.95 smd: 1(-0.825,0) 2(0.825,0)
  silkscreen extent -1.49,-0.38 0.05,0.74, body extent -0.81,-0.4 0.81,0.4, height 0.6
R0603 [mm] "Chip Resistor, 2-Leads, Body 1,60x0,80mm, IPC Medium Density"
  rect 0.85x0.9 smd: 1(-0.775,0) 2(0.775,0)
  body extent -0.8,-0.4 0.8,0.4, height 0.45
SOT143-4 [mm] "SOT143, 4-Leads, Body 2,92x2,37mm, Pitch 1,90mm, IPC Medium Density"
  rect 1x1 smd: 1(-1.2,0.75)
  rect 1x0.6 smd: 2(-1.2,-0.95) 3(1.2,-0.95) 4(1.2,0.95)
  silkscreen extent -1.25,-1.5 0.7,1.6, body extent -1.18,-1.45 1.18,1.45, height 1.22

## Part data
C1: library part c0008, "=Описание", HelpURL=https://www.yageo.com/upload/media/product/productsearch/datasheet/mlcc/UPY-GPHC_X5R_4V-to-50V_26.pdf, ID=c0008, Корпус=0603, Наименование=CC0603KRX5R9BB225, Номинал="2,2 мк", Номинальное напряжение="50 В", Описание="Конденсатор чип 0603 2,2 мкФ 50 В ±10 %", Отклонение="±10 %", Производитель=Yageo, Рабочие температуры="от -55 °С до +85 °С", Фамилия=Самарин
C2 C5: library part c0005, "=Описание", HelpURL=https://www.yageo.com/upload/media/product/products/datasheet/mlcc/UPY-GPHC_X7R_6.3V-to-50V_20.pdf, ID=c0005, Корпус=0603, Наименование=CC0603JRX7R9BB104, Номинал="0,1 мк", Номинальное напряжение="50 В", Описание="Конденсатор чип 0603 0,1 мкФ 50 В ±5 %", Отклонение="±5 %", Производитель=Yageo, Рабочие температуры="от -55 °С до +125 °С", Фамилия=Ларионов
C3: library part c0007, "=Описание", HelpURL=https://www.yageo.com/upload/media/product/products/datasheet/mlcc/UPY-GPHC_X7R_6.3V-to-50V_20.pdf, ID=c0007, Корпус=0603, Наименование=CC0603KRX7R8BB105, Номинал="1 мк", Номинальное напряжение="25 В", Описание="Конденсатор чип 0603 1 мкФ 25 В ±10 %", Отклонение="±10 %", Производитель=Yageo, Рабочие температуры="от -55 °С до +125 °С", Фамилия=Ларионов
C4: library part c0006, "=Описание", HelpURL=https://www.yageo.com/upload/media/product/productsearch/datasheet/mlcc/UPY-GPHC_X5R_4V-to-50V_26.pdf, ID=c0006, Корпус=0603, Наименование=CC0603KRX5R8BB475, Номинал="4,7 мк", Номинальное напряжение="25 В", Описание="Конденсатор чип 0603 4,7 мкФ 25 В ±10 %", Отклонение="±10 %", Производитель=Yageo, Рабочие температуры="от -55 °С до +85 °С", Фамилия=Ларионов
DD1: library part CP2112
HL1: library part hl0005, "=Описание", HelpURL=https://www.vishay.com/leds/list/product-83173/, ID=hl0005, Корпус=0603, Наименование=TLMG1100-GS08, Номинальная длина волны="570 нм", Номинальная сила света="35 мкд", Номинальное падение напряжения="2,1 В", Номинальный прямой ток="30 мА", Описание="Светодиод чип 0603 зеленый", Производитель="Vishay Intertechnology, Inc.", Рабочие температуры="от -40 °С до +100 °С", Рассеиваемая мощность="90 мВт", Фамилия=Ларионов, Цвет=Green
HL2: library part hl0003, "=Описание", HelpURL=https://www.vishay.com/leds/list/product-83172/, ID=hl0003, Корпус=0603, Наименование=TLMY1000-GS08, Номинальная длина волны="588 нм", Номинальная сила света="7,5 мкд", Номинальное падение напряжения="1,8 В", Номинальный прямой ток="15 мА", Описание="Светодиод чип 0603 желтый", Производитель="Vishay Intertechnology, Inc.", Рабочие температуры="от -40 °С до +100 °С", Рассеиваемая мощность="40 мВт", Фамилия=Ларионов, Цвет=Yellow
HL3: library part hl0001, "=Описание", HelpURL=https://www.vishay.com/leds/list/product-83172/, ID=hl0001, Корпус=0603, Наименование=TLMS1000-GS08, Номинальная длина волны="628 нм", Номинальная сила света="4 мкд", Номинальное падение напряжения="1,8 В", Номинальный прямой ток="15 мА", Описание="Светодиод чип 0603 красный", Производитель="Vishay Intertechnology, Inc.", Рабочие температуры="от -40 °С до +100 °С", Рассеиваемая мощность="40 мВт", Фамилия=Ларионов, Цвет=Red
L1: library part l0001, "=Описание", HelpURL=https://www.murata.com/en-global/products/productdetail.aspx?partno=BLM18KG221SH1%23, ID=l0001, Корпус=0603, Наименование=BLM18KG221SH1D, Описание="Ферритовая бусина 220 Ом ±25 %", Отклонение, 100 Мгц="±25 %", Производитель="Murata Manufacturing Co., Ltd.", Рабочие температуры="от -55 °С до +125 °С", Сопротивление, 100 МГц="220 Ом", Сопротивление при постоянном токе="0,05 Ом", Фамилия=Ларионов
R1: library part r0007, "=Описание", HelpURL=https://www.yageo.com/upload/media/product/productsearch/datasheet/rchip/PYu-RC_Group_51_RoHS_L_11.pdf, ID=r0007, Корпус=0603, Наименование=RC0603FR-074K7L, Номинал="4,7 к", Номинальное напряжение="75 В", Номинальный ток="1 А", Описание="Резистор чип 0603 4,7 кОм ±1 % 0,1 Вт", Отклонение="±1 %", Производитель=Yageo, Рабочие температуры="от -55 °С до +155 °С", Фамилия=Ларионов
R2 R3: library part r0008, "=Описание", HelpURL=https://www.yageo.com/upload/media/product/productsearch/datasheet/rchip/PYu-RC_Group_51_RoHS_L_11.pdf, ID=r0008, Корпус=0603, Наименование=RC0603FR-07220RL, Номинал=220, Номинальное напряжение="75 В", Номинальный ток="1 А", Описание="Резистор чип 0603 220 Ом ±1 % 0,1 Вт", Отклонение="±1 %", Производитель=Yageo, Рабочие температуры="от -55 °С до +155 °С", Фамилия=Ларионов
R4 R5 R6: library part r0012, "=Описание", HelpURL=https://www.yageo.com/upload/media/product/productsearch/datasheet/rchip/PYu-RC_Group_51_RoHS_L_11.pdf, ID=r0012, Корпус=0603, Наименование=RC0603FR-0710KL, Номинал="10 к", Номинальное напряжение="75 В", Номинальный ток="1 А", Описание="Резистор чип 0603 10 кОм ±1 % 0,1 Вт", Отклонение="±1 %", Производитель=Yageo, Рабочие температуры="от -55 °С до +155 °С", Фамилия=Самарин
S1: library part sw0001, "=Описание", HelpURL=https://www.ckswitches.com/products/switches/product-details/DIP/SDA/SDA02H1SBD/, ID=sw0001, Количество контактов=2, Корпус=7,06х9,30х5,45, Наименование=SDA02H1SBD, Описание="2-х позиционный движковый переключатель", Производитель=C&K, Промывка=Разрешена, Рабочие температуры="от -40 °С до +85 °С", Сопротивление контакта="50 мОм", Ток нагрузки="100 мА @ 5 В", Фамилия=Козлов
S2: library part sw0002, "=Описание", HelpURL=https://www.te.com/usa-en/product-4-1437565-1.html, ID=sw0002, Количество контактов=1, Корпус=6,00x6,00x4,98, Наименование=FSM4JSMA, Описание="Тактовая кнопка поверхностного монтажа", Производитель="TE Connectivity", Промывка=Разрешена, Рабочие температуры="от –35 °С до +85 °С", Сопротивление контакта="100 мОм", Ток нагрузки="50 мА @ 24 В", Фамилия=Паньков
VD1 VD2: library part vd0001, "=Описание", ID=vd0001, Фамилия=Ларионов
  VD1: HelpURL=https://www.littelfuse.com/products/tvs-diode-arrays/general-purpose-esd-protection/sp050xba-lead-free-green.aspx, Корпус=SOT143-4, Наименование=SP0503BAHTG, Описание="Диодная сборка для подавления помех, 5 В", Производитель="Littelfuse, Inc."
  VD2: HelpURL=https://www.vishay.com/product?docid=88740, Импульсное обратное напряжение="30 В", Корпус=DO-214AC, Макс допустимый средний прямой ток="1,5 А", Наименование=SL13-E3/5AT, Описание="Диод Шоттки 30 В 1,5 А", Пиковое прямое напряжение="0,445 В", Производитель="Vishay Intertechnology, Inc.", Рабочие температуры="от -55 °С до +125 °С"
X1: library part x0001, "=Описание", Contact_1=VBUS, Contact_2=D-, Contact_3=D+, Contact_4=ID, Contact_5=GND, HelpURL=https://www.te.com/global-en/product-2108877-1.html, ID=x0001, Наименование=2108877-1, Описание="Micro USB Type B IP68 гнездо", Производитель="TE Connectivity", Фамилия=Ларионов
X2: library part x0003, "=Описание", Contact_1=+3.3V, Contact_2=+5V, Contact_3=SCL, Contact_4=SDA, Contact_5=GND, Contact_6=GND, HelpURL=http://www.connfly.com/productshow.aspx?id=118, ID=x0003, Наименование=DS1021-2*3SF11, Описание="PLS 3x2 pin 2,54 мм вилка прямой", Производитель="Connfly Electronic Co. LTD", Фамилия=Самарин

## Via types
v1: diameter 0.6, hole 0.3, Top Layer to Bottom Layer, tented top, 75 vias
v2: diameter 0.65, hole 0.325, Top Layer to Bottom Layer, 4 vias

## Nets (pads, with @x,y where several pads share a name; then routed paths per layer and width w, separated by ;. In a path a pad name is that pad's centre, name@x,y a point inside that pad or via, vN(x,y) a via of type N, cw(c..) or ccw(c..) an arc to the next point about the centre after c; other vN are vias at no path point)
+3.3V: C1.1 C2.1 DD1.5 DD1.6 R1.1 R2.2 R3.2 X2.1 | length 14.8
  Top Layer w0.15: R3.2 13.025,7.275 13.764,8.014 13.764,8.414 v1(13.85,8.5) 13.936,8.414 13.936,8.064 14.725,7.275 R2.2 ; R2.2@14.75,7.475 R2.2@14.775,7.475 ; C2.1 19.05,7.225 19.679,7.854 19.679,8.129 v1(20.05,8.5) 20.421,8.129 20.421,7.854 21.05,7.225 C1.1 ; DD1.6 24.75,14.75 v1(24.25,15.25) DD1.5 ; R1.1@35.85,6.1 35.775,6.025 R1.1 v1(36.75,6) ; v1(37.75,14.75) X2.1
+5V: C3.1 DD1.7 DD1.8 L1.2 R4.2 R5.2 R6.2 X2.2 | length 10.3
  Top Layer w0.15: v1(11.25,8.5) 11.25,7.45 R6.2@11.325,7.375 ; C3.1@17.05,7.2 v1(17.05,8.5) ; DD1.7 27,13.372 v1@27.2,13.172 ; v1(27.2,13.05) v1@27.2,13.172 ; DD1.8 27.481,14.031 27.481,13.453 v1@27.2,13.172 ; R4.2 34.225,7.525 33.875,7.875 33.375,7.875 v1(33,8.25) 33.375,8.625 33.875,8.625 34.225,8.975 R5.2 ; v1(37.75,17.25) 37.77,17.27 40.4,17.27 X2.2
  other v1: 19.25,12.75 20.25,12.75 19.25,13.75 20.25,13.75 19.25,14.75 20.25,14.75 19.25,15.75
CN_5V_IN: VD2.2 X1.1 | length 5.5
  Top Layer w0.15: VD2.2@8.9,14.1 VD2.2
  Top Layer w0.5: X1.1 7.45,12.6 9.55,14.7 VD2.2
CN_5V_N: DD1.4 VD1.3 X1.2 | length 24.3
  Top Layer w0.15: X1.2 v1(8.8,12) 10.05,12 VD1.3 ; v1(22.75,15.75) DD1.4
  Bottom Layer w0.15: v1(8.8,12) 13.8,17 19.5,17 20.75,15.75 v1(22.75,15.75)
CN_5V_P: DD1.3 VD1.4 X1.3 | length 26.1
  Top Layer w0.15: X1.3 7.3,11.5 v1(8.8,10) 10.05,10 VD1.4 ; v1(23.5,16.25) DD1.3
  Bottom Layer w0.15: v1(8.8,10) 19.25,10 23.5,14.25 v1(23.5,16.25)
CN_VPP: C4.2 DD1.16 | length 1.9
  Top Layer w0.15: DD1.16 C4.2
GND: C1.2 C2.2 C3.2 C4.1 C5.2 DD1.2 HL3.1 S2.2 VD1.1 X1.5 X1.TP1 X2.5 X2.6
  other v1: 4.5,1 6,1 7.5,1 41.5,1 43,1 44.5,1 4.5,2.5 6,2.5 7.5,2.5 41.5,2.5 43,2.5 44.5,2.5 4.5,4 6,4 7.5,4 41.5,4 43,4 44.5,4 25,5.5 26.5,5.5 28,5.5 25,7 26.5,7 28,7 25,8.5 26.5,8.5 28,8.5 33,11.5 34.5,11.5 36,11.5 33,13 34.5,13 36,13 33,14.5 34.5,14.5 36,14.5 5,18.5 6.5,18.5 8,18.5 10.5,18.5 12,18.5 13.5,18.5 5,20 6.5,20 8,20 10.5,20 12,20 13.5,20
NetHL1_2: HL1.2 R2.1 | length 5.1
  Top Layer w0.15: R2.1@14.775,5.725 R2.1 15.1,5.375 15.738,5.375 17.713,3.4 18.325,3.4 18.65,3.075 HL1.2
NetHL2_2: HL2.2 R3.1 | length 3.7
  Top Layer w0.15: R3.1@12.925,5.65 R3.1 13.025,5.725 13.375,5.375 13.375,4.85 15.15,3.075 HL2.2
NetHL3_2: HL3.2 R6.1 | length 3.6
  Top Layer w0.15: R6.1@11.275,5.725 R6.1 11.25,5.075 12.087,4.238 12.137,4.238 13.3,3.075 HL3.2
NetL1_1: L1.1 VD1.2 VD2.1 | length 6
  Top Layer w0.155: VD1.2 12.5,14.3 VD2.1
  Top Layer w0.5: VD2.1 L1.1
NetR4_1: R4.1 S1.1 | length 4.3
  Top Layer w0.15: R4.1 36.75,7.5 37.875,6.375 37.875,5.905 38.55,5.23 S1.1
NetR5_1: R5.1 S1.3 | length 4
  Top Layer w0.15: R5.1 37,9 37.25,8.75 37.25,8.088 37.338,8 38.565,8 S1.3@38.835,7.73
nRST: C5.1 DD1.9 R1.2 S2.1 | length 19.1
  Top Layer w0.15: DD1.9@27.981,14.031 27.981,13.796 29.99,11.787 29.99,11.55 29.99,2.45 32.175,2.45 34.225,4.5 C5.1 34.225,4.575 R1.2
RX: DD1.22 HL2.1 | length 30.8
  Top Layer w0.15: HL2.1 16.975,2.825 v1(16.975,1.75) ; DD1.22 28,19.1 v1(28.45,19.55)
  Bottom Layer w0.15: v1(16.975,1.75) 17,1.775 17,2.25 21.5,6.75 21.5,10.75 25,14.25 25,15.75 23.75,17 23.75,19.25 25.5,21 27.5,21 28.45,20.05 v1(28.45,19.55)
SCL: DD1.24 S1.2 X2.3 | length 34.4
  Top Layer w0.15: v1(26.45,19.55) 26.45,18.8 27,18.25 DD1.24 ; X2.3 42.96,5.79 43.5,5.25 47.105,5.25 S1.2
  Bottom Layer w0.15: v1(26.45,19.55) 28.5,17.5 34.912,17.5 35,17.412 35,16.25 35.35,15.9 41.81,15.9 X2.3
SDA: DD1.1 S1.4 X2.4 | length 45.1
  Top Layer w0.15: v1(25.244,17.256) 25.247,17.253 26.297,17.253 DD1.1 ; X2.4 44.25,16 44.25,7.838 44.338,7.75 47.105,7.75 S1.4 S1.4@47.165,7.73
  Bottom Layer w0.15: v1(25.244,17.256) 25.994,17.256 26.75,16.5 26.75,14.338 26.838,14.25 28,14.25 32.25,10 44.162,10 44.25,10.088 44.25,16 X2.4
TX: DD1.23 HL1.1 | length 28
  Top Layer w0.15: HL1.1 20.475,2.825 v1(20.475,1.75) ; v1(27.475,19.525) 27.487,19.513 27.487,17.963 DD1.23
  Bottom Layer w0.15: v1(20.475,1.75) 20.5,1.775 20.5,2.25 22.5,4.25 22.5,10 25.75,13.25 25.75,16.25 25.25,16.25 24.25,17.25 24.25,19 25.5,20.25 25.5,20.412 25.588,20.5 27.162,20.5 27.475,20.187 v1(27.475,19.525)
pads on no net: DD1.10 DD1.11 DD1.12 DD1.13 DD1.14 DD1.15 DD1.17 DD1.18 DD1.19 DD1.20 DD1.21 DD1.25 X1.4
copper on no net:
  other v2: 27.7,15.45 28.8,15.45 27.7,16.55 28.8,16.55

## Polygon pours and split planes (outlines as drawn)
GND on Top Layer "GND_L01_P056" (solid, remove dead copper, pour order 56): 0,0 0,21.5 49.25,21.5 49.25,0
+3.3V on Top Layer "+3.3V_L01_P068" (solid, remove dead copper, pour order 68): 0,0
+3.3V on Top Layer "+3.3V_L01_P066" (solid, remove dead copper, pour order 66): 0,0
+5V on Top Layer "+5V_L01_P048" (solid, remove dead copper, pour order 48): 17,16.25 20,16.25 21.75,14.5 21.75,12.75 21.25,12.25 17,12.25
+5V on Top Layer "+5V_L01_P032" (solid, remove dead copper, pour order 32): 82.25,21.75
GND on Top Layer "Top Layer-GND" (solid, pour order 8): 98,63
+5V on Signal Layer 1 "+5V_L02_P072" (solid, remove dead copper, pour order 72): 0,0 0,21.5 49.25,21.5 49.25,0
+3.3V on Signal Layer 1 "+3.3V_L02_P064" (solid, remove dead copper, pour order 64): 0,0
+3.3V on Signal Layer 1 "+3.3V_L02_P062" (solid, remove dead copper, pour order 62): 36.25,5.5 37.5,5.5 38.25,6.25 38.25,15.5 29.75,15.5 29.5,15.25 29.5,14.75 26.75,14.75 25.75,15.75 24.75,15.75 24.75,13.75 30.75,13.75 31.25,14.25 31.25,15 36.75,15 36.75,7.25 36.25,6.75
+3.3V on Signal Layer 1 "+3.3V_L02_P060" (solid, remove dead copper, pour order 60): 12.75,9.25 15,9.25 15,7.25 19.25,7.25 19.25,9 20.5,10.25 20.75,10.5 21.25,11 23.25,13 23.25,15.125 23.667,15.75 24.75,15.75 25,15.5 25,13.75 20.75,9.5 20.75,8.25 20.75,6.75 12.75,6.75
GND on Signal Layer 2 "GND_L03_P058" (solid, remove dead copper, pour order 58): 0,0 0,21.5 49.25,21.5 49.25,0

## Other copper
Top Layer:
  region: 0,50.5
  region: 0,0

## Silkscreen, mask and mechanical layers (free items; w line width, h text height)
Top Overlay:
  text "USB-I2C" at 11.5,18.5 h2
  text "PWR" at 11.5,1.2 h1.2
  text "RX" at 15.3,1.2 h1.2
  text "TX" at 19.1,1.2 h1.2
  text ".designation" at 33.5,0.5 h2
Bottom Overlay:
  text ".pcb_dec_number" at 49.65,0.5 h2
Board:
  the board outline again, w0.1
Assembly Notes (Mech5):
  text "'.title'" at 0,-2.05 h2
  text "'.project'_'.pcb_dec_number'['.Pcb_File_Name_No_Path']" at 0,-4.55 h2